# Altium PCB PCB1.PcbDoc
Units mm, origin at the board's own origin, x right, y up, seen from the top; angles counter-clockwise.
Board outline 59.7 x 49.51 mm, 2 copper layers (Top Layer, Bottom Layer); 48 components, 42 nets, 175 pads, 0 vias.
Unrouted connection lines stored in the file: 116.
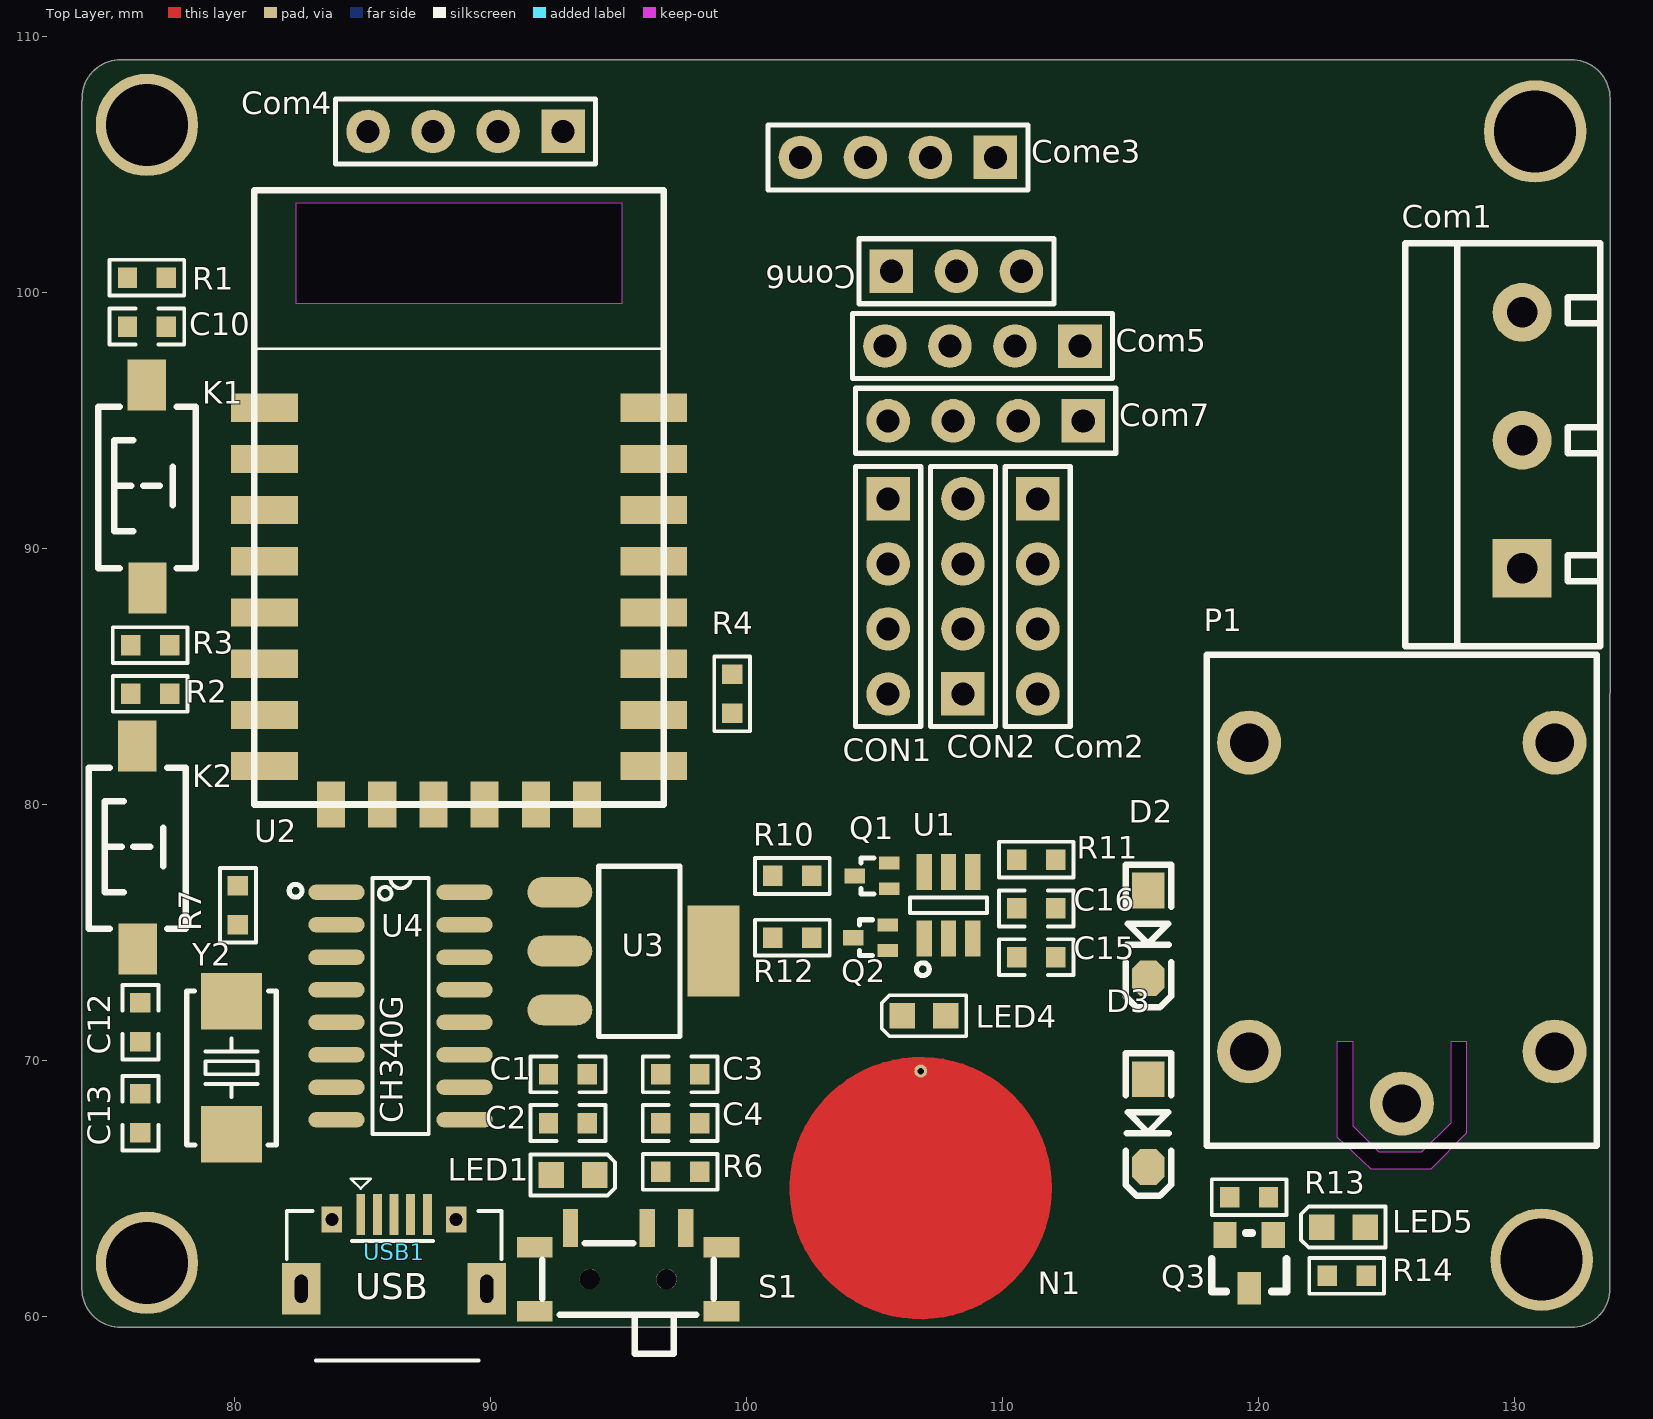
[diagram p0: Top Layer view]
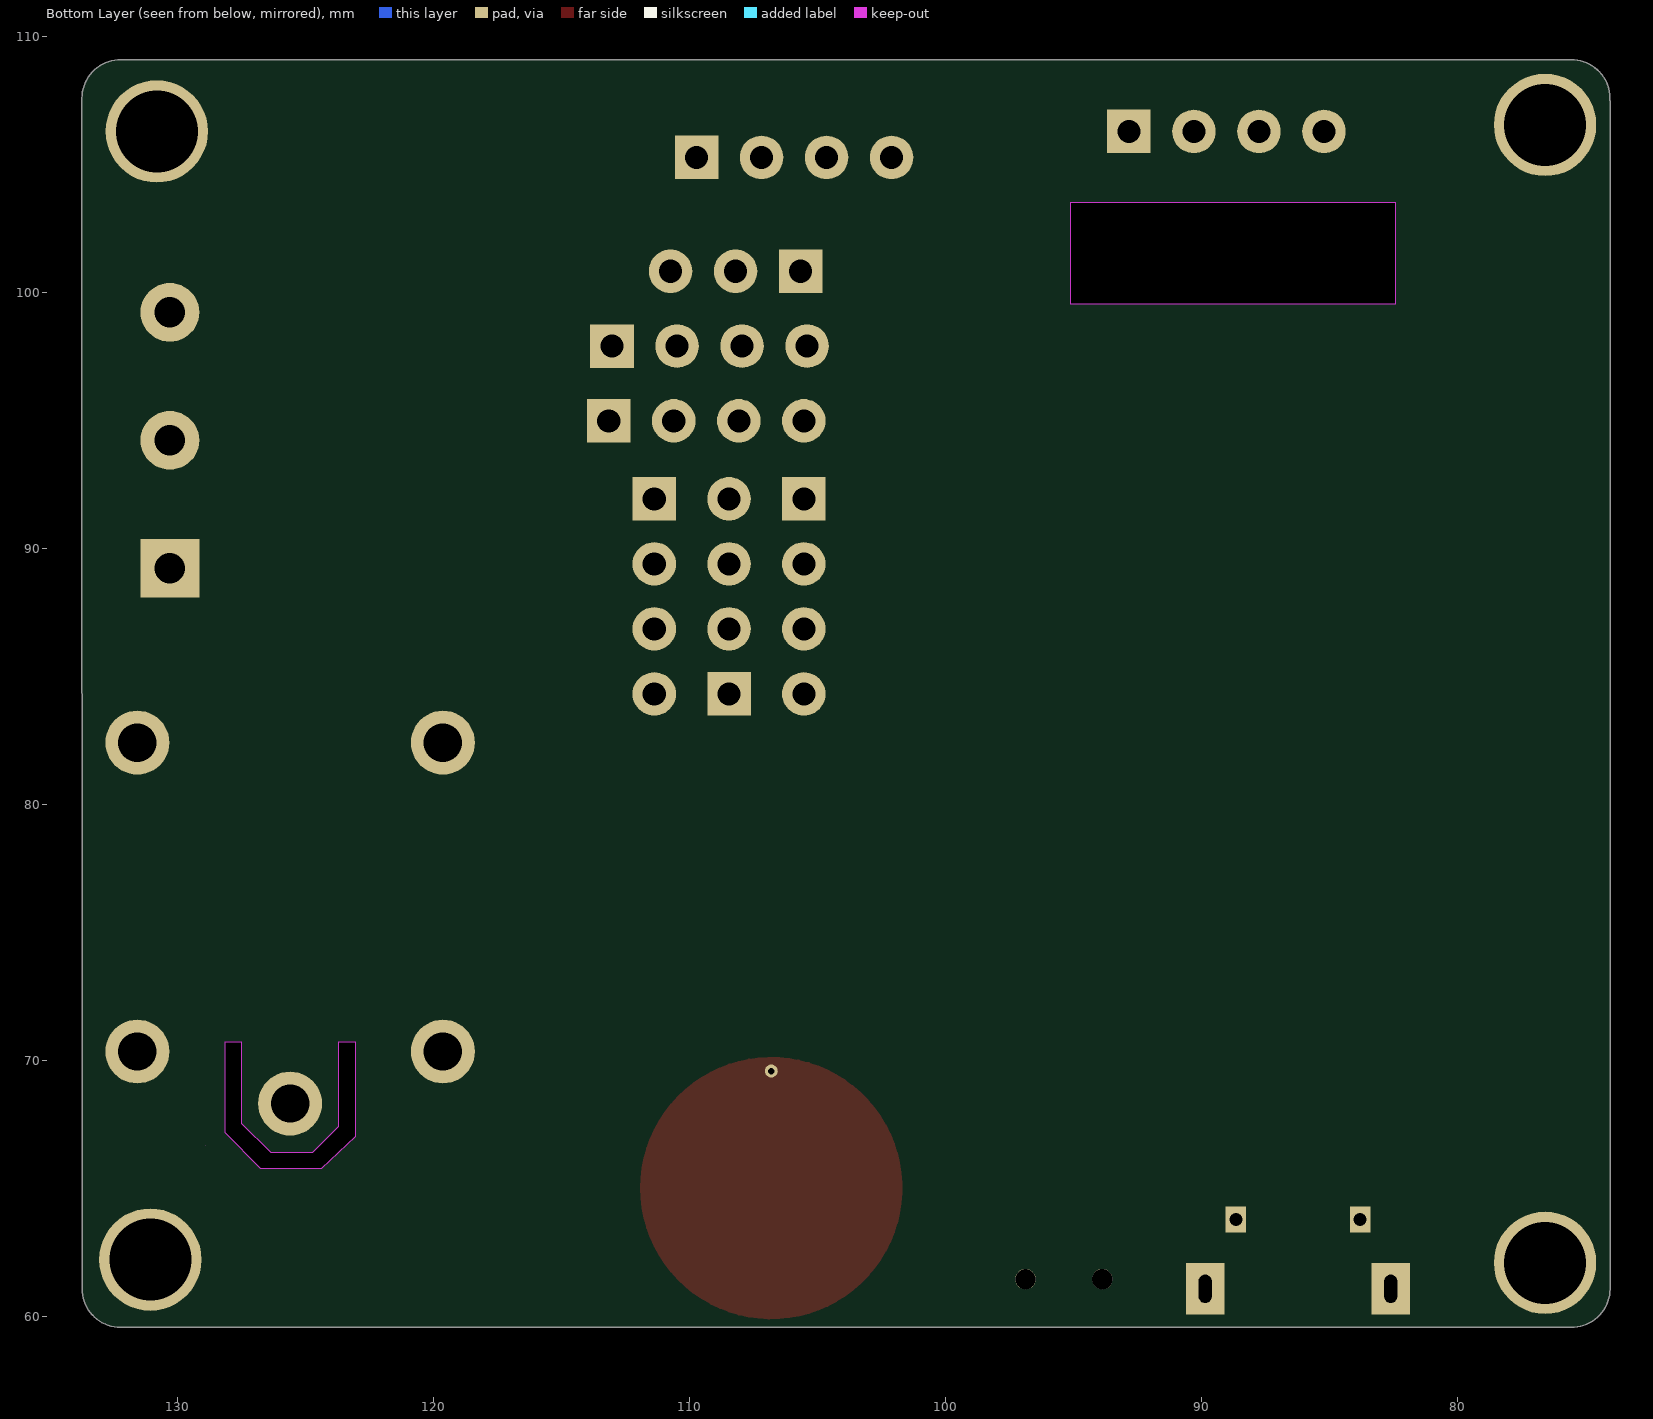
[diagram p1: Bottom Layer view, seen from below]

## Layer stack, top to bottom
Top Solder: solder mask 0.0102, Solder Resist, Dk 3.5
Top Layer: signal copper 0.0356
Dielectric 1: dielectric 0.32, FR-4, Dk 4.8
Bottom Layer: signal copper 0.0356
Bottom Solder: solder mask 0.0102, Solder Resist, Dk 3.5

## Board outline
74.041,61.087 74.041,107.49 74.049,107.49 cw(c75.545,107.597) 75.438,109.093 132.207,109.093 cw(c132.236,107.593) 133.736,107.593 133.731,61.087 cw(c132.231,61.087) 132.231,59.587 75.565,59.587 cw(c75.541,61.087)
cut-out: 128.905,66.675

## Design rules (kind name [scope] priority, off if disabled: settings)
Clearance [All] p1: gap=0.254 ignorepadtopadclearanceinfootprint=FALSE except(0: Arc-Hole Track-Hole SMDPad-Hole THPad-Hole Via-Hole Fill-Hole Poly-Hole Region-Hole Text-Hole)
PolygonConnect [All] p1: connectstyle=Relief reliefconductorwidth=0.254 reliefentries=4 polygonreliefangle="90 Angle" airgapwidth=0.254
RoutingVias [All] p1: holewidth=0.711 width=1.27 viastyle="Through Hole" minholewidth=0.711 minwidth=1.27 maxholewidth=0.711 maxwidth=1.27
SolderMaskExpansion [All] p1: expansion=0.102
Width [All] p1: maxlimit=0.254 minlimit=0.254 preferedwidth=0.254
30 further rules are at their usual default settings.

## Components (designator, comment, footprint, x,y, rotation, side; value= is the part's Value field where it differs from the comment)
C1 "0.1uF" 0603C 93.028,69.469 r0 top
C2 "10uF" 0603C 93.028,67.564 r0 top
C3 "0.1uF" 0603C 97.409,69.469 r0 top
C4 "10uF" 0603C 97.409,67.564 r0 top
C10 "104" 0603C 76.581,98.679 r0 top
C12 "22pF" 0603C 76.327,71.501 r270 top
C13 "22pF" 0603C 76.327,67.945 r90 top
C15 "0~50pF" 0603C 111.321,74.041 r0 top
C16 "0.1uF" 0603C 111.321,75.946 r0 top
Com1 "COM3-relay" KF301-5.0-3P 130.302,94.234 r90 top
Com2 "COM4-SPI" HDR2.54-M-LI-4P 111.379,88.138 r270 top
Com4 "COM4_oled" HDR2.54-M-LI-4P 89.027,106.299 r180 top
Com5 "COM4-USART" HDR2.54-M-LI-4P 109.22,97.917 r180 top
Com6 "COM3-adc" HDR2.54-M-LI-3P 108.204,100.838 r0 top
Com7 "COM4_iic" HDR2.54-M-LI-4P 109.347,94.996 r180 top
Come3 "COM4-singlewire" HDR2.54-M-LI-4P 105.918,105.283 r180 top
CON1 "COM4" HDR2.54-M-LI-4P 105.537,88.138 r270 top
CON2 "COM4" HDR2.54-M-LI-4P 108.458,88.138 r90 top
D2 "Diode" SOD-123 115.697,74.93 r270 top
D3 "Diode" SOD-123 115.697,67.564 r270 top
K1 "Key-Reset" "TSW SMD-3*6*2.5" 76.581,92.456 r90 top
K2 "Key-Flash" "TSW SMD-3*6*2.5" 76.2,78.359 r90 top
LED1 "LED" 0603D 93.218,65.532 r0 top
LED4 "LED" 0603D 106.934,71.755 r180 top
LED5 "LED" 0603D 123.317,63.5 r180 top
N1 "TouchPad" TOUCHPAD 106.807,65.024 r90 top
P1 "Relay-TONGLING-5" TONGLING-RELAY-5 117.983,66.929 r90 top
Q1 "NPN_DTC143" SOT-523 104.902,77.216 r0 top
Q2 "NPN_DTC143" SOT-523 104.844,74.803 r0 top
Q3 "S8050" SOT23 119.634,62.126 r180 top
R1 "10K" 0603R 76.581,100.584 r0 top
R2 "10K" 0603R 76.708,84.328 r0 top
R3 "10K" 0603R 76.708,86.233 r0 top
R4 "1K" 0603R 99.441,84.328 r270 top
R6 "10K" 0603R 97.409,65.659 r0 top
R7 "4.7K" 0603R 80.137,76.073 r270 top
R10 "470" 0603R 101.796,77.216 r0 top
R11 "470" 0603R 111.321,77.851 r180 top
R12 "4.7k" 0603R 101.796,74.803 r0 top
R13 "1K" 0603R 119.634,64.666 r180 top
R14 "1K" 0603R 123.444,61.595 r0 top
S1 "SW-SPDT" MSK-12C01-07 95.377,61.468 r0 top
U1 "TTP223-BA" SOT23-6 107.892,76.073 r0 top
U2 "ESP8266" "ESP-12E&F MODULE" 88.773,87.757 r0 top
U3 "LM1117" SOT223 92.71,76.581 r270 top
U4 "CH340G" SOP16 86.487,72.136 r270 top
USB1 "USB-mini" USB-micro_A 86.233,61.087 r0 top
Y2 "12MHz" "YYC 6035-2P" 79.883,69.723 r270 top

## Footprints (in the part's own frame and the unit in brackets; to place one, negate y for a bottom-side part, rotate by r counter-clockwise, add the part's x,y. Pads: shape width x height; smd on the part's side, far side on the other; paste and mask are expansions set on the pad)
0603C [mm]
  rect 0.76x0.8 smd: 1(-0.76,0) 2(0.76,0)
  silkscreen extent -1.46,-0.7 1.46,0.7
0603D [mm]
  rect 1x1 smd: 1(0.85,0) 2(-0.85,0)
  silkscreen extent -1.65,-0.8 1.65,0.8
0603R [mm]
  rect 0.76x0.8 smd: 1(-0.76,0) 2(0.76,0)
  silkscreen extent -1.46,-0.7 1.46,0.7
"ESP-12E&F MODULE" [mm]
  rect 2.6x1.1 smd: 1(-7.6,7.75) 2(-7.6,5.75) 3(-7.6,3.75) 4(-7.6,1.75) 5(-7.6,-0.25) 6(-7.6,-2.25) 7(-7.6,-4.25) 8(-7.6,-6.25) 15(7.6,-6.25) 16(7.6,-4.25) 17(7.6,-2.25) 18(7.6,-0.25) 19(7.6,1.75) 20(7.6,3.75) 21(7.6,5.75) 22(7.6,7.75)
  rect 1.1x1.8 smd: 9(-5,-7.75) 10(-3,-7.75) 11(-1,-7.75) 12(1,-7.75) 13(3,-7.75) 14(5,-7.75)
  Keep-Out Layer board cut-out: -6.35,15.748 6.35,15.748 6.35,11.811 -6.35,11.811
  silkscreen extent -8,-7.75 8,16.25
HDR2.54-M-LI-3P [mm] "排母，3脚"
  rect 1.7x1.7 hole 0.9: 1(-2.54,0)
  round 1.7 hole 0.9: 2(0,0) 3(2.54,0)
  silkscreen extent -3.81,-1.27 3.81,1.27, body extent -3.81,-1.27 3.81,1.27, height 8.5
HDR2.54-M-LI-4P [mm] "排母，4脚"
  rect 1.7x1.7 hole 0.9: 1(-3.81,0)
  round 1.7 hole 0.9: 2(-1.27,0) 3(1.27,0) 4(3.81,0)
  silkscreen extent -5.08,-1.27 5.08,1.27, body extent -5.08,-1.27 5.08,1.27, height 8.5
KF301-5.0-3P [mm] "可拼接端子/6A"
  rect 2.3x2.3 hole 1.2: 1(-5,0)
  round 2.3 hole 1.2: 2(0,0) 3(5,0)
  silkscreen extent -8.05,-3.05 7.7,4.57, body extent -7.87,-3 7.63,4.6, height 10.05
MSK-12C01-07 [mm] "6.7*2.8*1.5mm(长宽高）"
  rect 1.4x0.8 smd: 0(-3.65,-1.25) 0(-3.65,1.25) 0(3.65,-1.25) 0(3.65,1.25)
  rect 0.6x1.5 smd: 1(-2.25,1.996) 2(0.75,1.996) 3(2.25,1.996)
  round 0.8 hole 0.8: " "(-1.5,0) " "(1.5,0)
  silkscreen extent -3.35,-2.92 3.35,1.4, body extent -3.92,-2.9 3.92,2.4, height 1.5
SOD-123 [mil] "2.7x1.6X1.1mm（长宽高，不包括引脚）"
  rect 55x50 smd: 1(-67.5,0)
  oct 55x50 smd: 2(67.5,0)
  silkscreen extent -108,-35 112,35, body extent -73,-31 73,31, height 48
SOP16 [mm]
  oval 0.6x2.2 smd: 1(-4.445,-2.5) 2(-3.175,-2.5) 3(-1.905,-2.5) 4(-0.635,-2.5) 5(0.635,-2.5) 6(1.905,-2.5) 7(3.175,-2.5) 8(4.445,-2.5) 9(4.445,2.5) 10(3.175,2.5) 11(1.905,2.5) 12(0.635,2.5) 13(-0.635,2.5) 14(-1.905,2.5) 15(-3.175,2.5) 16(-4.445,2.5)
  silkscreen extent -5,-4.35 5,1.1
SOT23 [mil]
  rect 36x40 smd: 1(-37,-42) 3(37,-42)
  rect 36x50 smd: 2(0,40)
  silkscreen extent -58,-45 58,45, body extent -57,-47 57,51, height 39
SOT23-6 [mm]
  rect 0.6x1.4 smd: 1(-0.95,-1.3) 2(0,-1.3) 3(0.95,-1.3) 4(0.95,1.3) 5(0,1.3) 6(-0.95,1.3)
  silkscreen extent -1.5,-2.75 1.5,0.3
SOT223 [mm]
  oval 1.2x2.54 smd: 1(4.6,0) 2(0,0) 3(2.3,0)
  rect 3.556x2.032 smd: 3(2.3,6)
  silkscreen extent -1.02,1.52 5.64,4.7, body extent -0.84,-0.51 5.46,6.39, height 1.6
SOT-523 [mm]
  rect 0.8x0.5 smd: 1(0.675,-0.5) 2(0.675,0.5)
  rect 0.8x0.6 smd: 3(-0.675,0)
  silkscreen extent -0.42,-0.7 0.08,0.7, body extent -0.83,-0.8 0.78,0.8, height 0.8
TONGLING-RELAY-5 [mm]
  round 2.5 hole 1.5 mask+0.102: 1(3.429,-1.651) 2(1.397,-7.62) 3(3.429,-13.589) 4(15.494,-1.651) 5(15.494,-13.589)
  Keep-Out Layer board cut-out: 3.81,-5.08 0.103,-5.08 -1.143,-6.409 -1.143,-8.763 0.254,-10.16 3.81,-10.16 3.81,-9.525 0.635,-9.525 -0.508,-8.382 -0.508,-6.731 0.508,-5.715 3.81,-5.715
  silkscreen extent -0.25,-15.24 18.92,0
TOUCHPAD [mil]
  round 20 hole 10: 1(180,0)
  Top Layer circle w10: c0,0 r196.85
  Top Layer region: -10,200 -35,195 -90,175 -145,135 -165,105 -195,45 -195,-40 -165,-105 -135,-145 -105,-165 -55,-190 30,-195 80,-180 135,-145 180,-85 196.85,-36.85 196.85,0 190,50 170,100 120,160 90,175 55,190
  Top Layer pour cut-out: 100,50
"TSW SMD-3*6*2.5" [mm] "3*6*2.5mm"
  rect 2x1.5 smd: 1(-3.996,-0.02) 2(3.937,0)
  silkscreen extent -3.21,-1.9 3.09,1.9, body extent -4,-1.88 4,1.62, height 2.59
USB-micro_A [mm] "micro型USB ，5.7*7.8*2.5mm"
  rect 0.35x1.6 smd: 1(-1.3,2.9) 2(-0.65,2.9) 3(0,2.9) 4(0.65,2.9) 5(1.3,2.9)
  rect 1.5x2 hole 0.5 slot 1.1 at 90 deg: 5(-3.625,0) 5(3.625,0)
  rect 0.8x1 hole 0.5: 5(-2.425,2.71) 5(2.425,2.71)
  silkscreen extent -4.19,-2.79 4.19,4.3, body extent -4,-2.71 4,2.89, height 2.8
"YYC 6035-2P" [mm] "6mm*3.5mm*1mm(长*宽*高)"
  rect 2.2x2.4 smd: 1(-2.6,0) 2(2.6,0)
  silkscreen extent -3,-1.75 3.02,1.75, body extent -3,-1.75 3,1.75, height 1.06

## Part data
C1 C2 C3 C4 C10 C12 C13 C15 C16: library part CAP, "Capacitor"
Com5: library part COM4
Com7: library part COM4_oled
D2 D3: library part "Diode 1N914", "High Conductance Fast Diode", Code_JEDEC=DO-204-AH, ComponentLink1Description="Manufacturer Link", ComponentLink1URL=http://www.fairchildsemi.com/, ComponentLink2Description=Datasheet, ComponentLink2URL=http://www.fairchildsemi.com/ds/1N%2F1N4448.pdf, DatasheetVersion=1997, LatestRevisionDate=17-Jul-2002, LatestRevisionNote="Re-released for DXP Platform.", PackageDescription="Diode, Axial; Body 3.8 x 1.9 mm (LxDia. max), Lead Dia. 0.53 mm (max)", PackageReference=DO-35, Published=8-Jun-2000, Publisher="Altium Limited"
K1 K2: library part Key
LED1 LED4 LED5: library part LED2, "Typical RED, GREEN, YELLOW, AMBER GaAs LED", LatestRevisionDate=17-Jul-2002, LatestRevisionNote="Re-released for DXP Platform.", PackageDescription="SM LED; 2 Flat Leads", PackageReference=3.2X1.6X1.1, PackageVersion=Feb-2002, Published=8-Jun-2000, Publisher="Altium Limited"
Q3: library part NPN, "NPN Transistor"
R1 R2 R3 R4 R6 R7 R10 R11 R12 R13 R14: library part RES1
S1: "SPDT Subminiature Toggle Switch, Right Angle Mounting, Vertical Actuation", ComponentLink1Description="Manufacturer Link", ComponentLink1URL=http://www.apem.com, DatasheetVersion=05-Dec-2000, LatestRevisionDate=17-Dec-2003, LatestRevisionNote="Schematic revised, PCB Footprint replaced.", PackageDescription="Switch; 4 Leads", PackageReference=TL36WW15050, Published=24-Mar-1999, Publisher="Altium Limited"
U3: library part LM317
USB1: library part USBmini
Y2: library part CrystalPassive

## Free pads (board coordinates)
  round 4 hole 3.2: 1(76.581,106.553) 2(76.581,62.103) 3(130.81,106.299) 3(131.064,62.23)

## Nets (pads, with @x,y where several pads share a name; then routed paths per layer and width w, separated by ;. In a path a pad name is that pad's centre, name@x,y a point inside that pad or via, vN(x,y) a via of type N, cw(c..) or ccw(c..) an arc to the next point about the centre after c; other vN are vias at no path point)
ADC: Com6.1 U2.2
CS: Com2.1 U2.9
D+: U4.5 USB1.3
D-: U4.6 USB1.2
GND: C1.2 C2.2 C3.2 C4.2 C10.2 C12.2 C13.2 C15.2 C16.2 Com4.2 Com5.2 Com6.2 Com7.2 Come3.4 D2.1 K1.1 K2.2 LED1.2 P1.3 pad.1 pad.2 pad.3 Q2.2 R4.1 R14.1 U1.2 U2.15 U3.2 U4.1 USB1.5
GPIO00: CON2.4 K2.1 R3.1 U2.18
GPIO02: D3.1 U2.17
GPIO09: CON2.3 U2.11
GPIO10: CON2.2 U2.12
GPIO12: CON2.1 U2.6
GPIO13: CON1.4 U2.7
GPIO14: CON1.3 U2.5
GPIO15: CON1.2 R4.2 U2.16
GPIO16: Come3.2 CON1.1 U2.4
MISO: Com2.2 U2.10
MOSI: Com2.3 U2.13
NetC10_1: C10.1 K1.2 R1.1 U2.1
NetC12_1: C12.1 U4.7 Y2.1
NetC13_1: C13.1 U4.8 Y2.2
NetC15_1: C15.1 N1.1 U1.3
NetCom1_1: Com1.1 P1.4
NetCom1_2: Com1.2 P1.2
NetCom1_3: Com1.3 P1.5
NetD2_2: D2.2 LED5.1 P1.1 Q3.3
NetLED1_1: LED1.1 R6.1
NetLED4_1: LED4.1 R12.2
NetLED4_2: LED4.2 Q2.3
NetLED5_2: LED5.2 R14.2
NetQ3_1: Q3.1 R13.1
NetR2_1: R2.1 U2.3
NetR10_2: R10.2 U1.6
NetR11_2: R11.2 U1.4
NetS1_2: S1.2 USB1.1
RX_ESP: Com5.4 U2.21 U4.2
SCL-ESP: Com4.3 Com7.3 U2.20
SCLK: Com2.4 U2.14
SDA-ESP: Com4.4 Com7.4 U2.19
SOUT: Q1.1 Q2.1 U1.1
TouchOut: D3.2 Q1.2 R13.2
TX_ESP: Com5.3 R7.2 U2.22 U4.3
VCC+3.3v: C3.1 C4.1 C16.1 Com4.1 Com5.1 Com6.3 Com7.1 Come3.1 Q1.3 Q3.2 R1.2 R2.2 R3.2 R6.2 R10.1 R11.1 R12.1 U1.5 U2.8 U3.3
VCC+5v: C1.1 C2.1 R7.1 S1.3 U3.1 U4.16
pads on no net: "S1. " Come3.3 S1.0 S1.1 U4.4 U4.9 U4.10 U4.11 U4.12 U4.13 U4.14 U4.15 USB1.4

## Silkscreen, mask and mechanical layers (free items; w line width, h text height)
Mechanical 1:
  lines w0.254: 74.041,61.087 74.041,107.49 ; 75.438,109.093 132.207,109.093 ; 75.565,59.587 132.231,59.587 ; 133.731,61.087 133.736,107.593
Mechanical 13:
  lines w0.254: 74.041,61.087 ccw(c75.541,61.087) 75.565,59.587 ; 74.049,107.49 cw(c75.545,107.597) 75.438,109.093 ; 132.207,109.093 cw(c132.236,107.593) 133.736,107.593 ; 132.231,59.587 ccw(c132.231,61.087) 133.731,61.087

## Dimensions
133.731,109.093 to 74.041,109.106 on Mechanical 1
74.041,109.106 to 74.041,59.563 on Mechanical 1

## Text inside footprints (layer, text, board x,y; h text height)
USB1: Top Overlay "USB" at 84.709,60.685 h1.02